# Altium PCB 8Relay.PcbDoc (part 2 of 2)
Units mm, origin at the board's own origin, x right, y up, seen from the top; angles counter-clockwise.
Board outline 164.68 x 100.38 mm, 2 copper layers (Top Layer, Bottom Layer); 122 components, 159 nets, 559 pads, 183 vias.
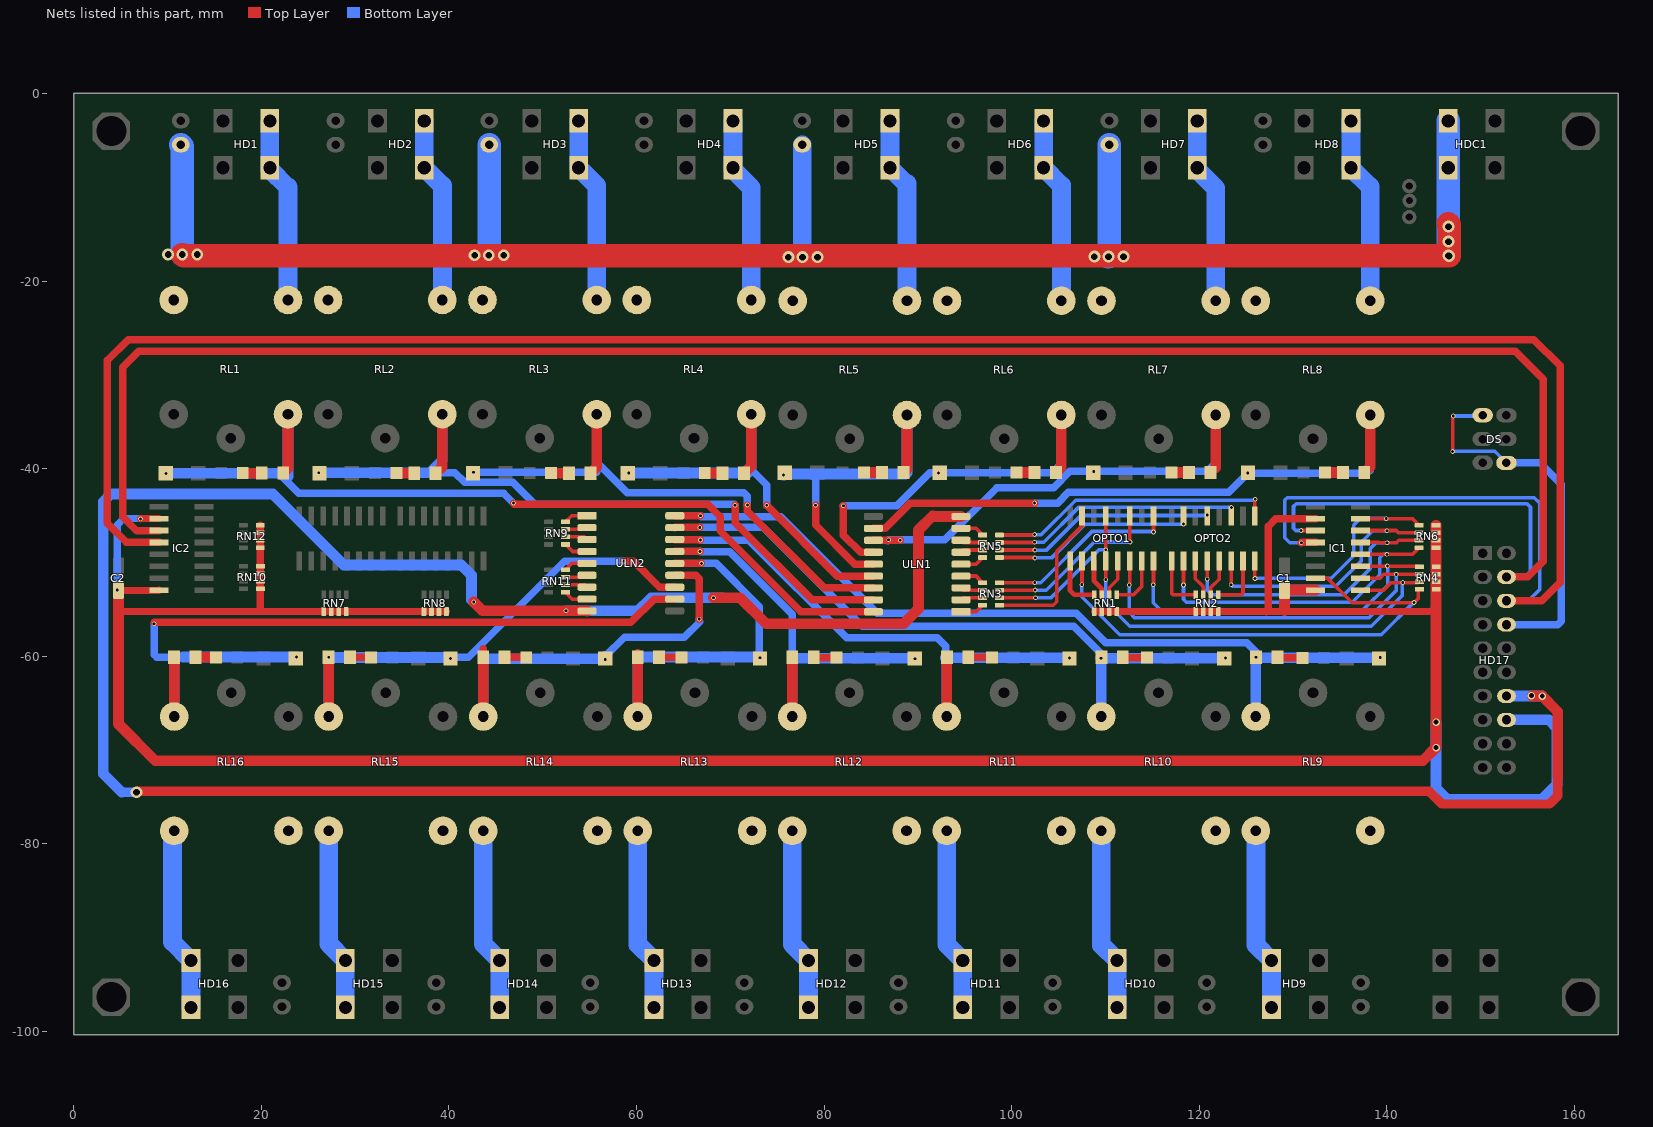
[diagram p2: the nets of this part, all layers, seen from the top]

## Via types
v1: diameter 0.5, hole 0.3, Top Layer to Bottom Layer, 121 vias
v2: diameter 1.27, hole 0.711, Top Layer to Bottom Layer, 54 vias
v3: diameter 0.8, hole 0.5, Top Layer to Bottom Layer, 8 vias

## Nets (pads, with @x,y where several pads share a name; then routed paths per layer and width w, separated by ;. In a path a pad name is that pad's centre, name@x,y a point inside that pad or via, vN(x,y) a via of type N, cw(c..) or ccw(c..) an arc to the next point about the centre after c; other vN are vias at no path point) (continued)
N_LE: HDC1.2 JN1.2 JN3.2 JN5.2 JN7.2 | length 201.1
  Top Layer w2.5: v2(11.55,-17.17) 11.703,-17.323 v2(146.653,-17.323) 146.653,-13.995 v2@146.551,-13.894
  Bottom Layer w2: v2@11.55,-17.043 v2@11.652,-16.942 ; v2@44.24,-17.12 v2@44.342,-17.018 ; JN5.2@77.667,-5.461 77.667,-17.424 v2(77.692,-17.45) ; v2@77.692,-17.323 v2@77.794,-17.221 ; v2@110.331,-17.272 v2@110.433,-17.17
  Bottom Layer w2.5: JN1.2@11.398,-5.461 11.55,-5.613 v2(11.55,-17.17) ; v2(44.24,-17.247) 44.291,-17.196 JN3.2@44.291,-5.461 ; v2(110.331,-17.399) 110.433,-17.297 JN7.2@110.433,-5.461 ; v2@146.565,-17.235 HDC1.2@146.565,-7.916 HDC1.2@146.565,-2.916
  other v2: 76.193,-17.45 79.292,-17.45 108.832,-17.399 111.931,-17.399 146.602,-17.297 42.742,-17.247 45.84,-17.247 10.052,-17.17 13.151,-17.17 146.602,-15.799 146.602,-14.199
NC1: RL1.2
NC2: RL2.2
NC3: RL3.2
NC4: RL4.2
NC5: RL5.2
NC6: RL6.2
NC7: RL7.2
NC8: RL8.2
NC9: RL9.2
NC10: RL10.2
NC11: RL11.2
NC12: RL12.2
NC13: RL13.2
NC14: RL14.2
NC15: RL15.2
NC16: RL16.2
NetLED1_2: LED1.2 R1.2 | length 2
  Top Layer w1.143: LED1.2@18.002,-40.488 20.021,-40.488 R1.2@20.034,-40.475
NetLED2_2: LED2.2 R2.2 | length 1.9
  Top Layer w1.143: LED2.2@34.385,-40.488 36.277,-40.488 R2.2@36.29,-40.5
NetLED3_2: LED3.2 R3.2 | length 1.9
  Top Layer w1.143: LED3.2@50.895,-40.488 52.787,-40.488 R3.2@52.8,-40.5
NetLED4_2: LED4.2 R4.2 | length 1.9
  Top Layer w1.143: LED4.2@67.278,-40.488 69.17,-40.488 R4.2@69.183,-40.5
NetLED5_2: LED5.2 R5.2 | length 1.9
  Top Layer w1.143: LED5.2@84.271,-40.424 86.163,-40.424 R5.2@86.176,-40.437
NetLED6_2: LED6.2 R6.2 | length 1.9
  Top Layer w1.143: LED6.2@100.527,-40.424 102.419,-40.424 R6.2@102.432,-40.437
NetLED7_2: LED7.2 R7.2 | length 1.9
  Top Layer w1.143: LED7.2@117.037,-40.424 118.929,-40.424 R7.2@118.942,-40.437
NetLED8_2: LED8.2 R8.2 | length 1.9
  Top Layer w1.143: LED8.2@133.42,-40.424 135.312,-40.424 R8.2@135.325,-40.437
NetLED9_2: LED9.2 R9.2 | length 2.7
  Top Layer w0.8: R9.2@128.34,-60.122 128.416,-60.198 LED9.2@131.007,-60.198
NetLED10_2: LED10.2 R10.2 | length 2.6
  Top Layer w0.8: R10.2@111.859,-60.122 111.895,-60.158 LED10.2@114.453,-60.158
NetLED11_2: LED11.2 R11.2 | length 2.5
  Top Layer w0.8: R11.2@95.378,-60.122 97.863,-60.122 LED11.2@97.9,-60.158
NetLED12_2: LED12.2 R12.2 | length 2.5
  Top Layer w0.8: R12.2@78.897,-60.122 78.933,-60.158 LED12.2@81.346,-60.158
NetLED13_2: LED13.2 R13.2 | length 2.4
  Top Layer w0.8: R13.2@62.416,-60.122 64.756,-60.122 LED13.2@64.792,-60.158
NetLED14_2: LED14.2 R14.2 | length 2.3
  Top Layer w0.8: R14.2@45.935,-60.122 48.202,-60.122 LED14.2@48.239,-60.158
NetLED15_2: LED15.2 R15.2 | length 2.2
  Top Layer w0.8: R15.2@29.454,-60.122 31.649,-60.122 LED15.2@31.685,-60.158
NetLED16_2: LED16.2 R16.2 | length 2.2
  Top Layer w1.143: R16.2@12.973,-60.122 15.095,-60.122 LED16.2@15.132,-60.158
NO1: HD1.1 RL1.3 | length 19.8
  Bottom Layer w2: HD1.1@20.895,-3.094 20.895,-8.094 22.828,-10.027 ; RL1.3@22.828,-22.022 22.828,-9.982
NO2: HD2.1 RL2.3 | length 20
  Bottom Layer w2: HD2.1@37.363,-2.916 HD2.1@37.363,-7.916 39.296,-9.85 ; RL2.3@39.296,-22.022 39.296,-9.804
NO3: HD3.1 RL3.3 | length 20
  Bottom Layer w2: HD3.1@53.83,-2.916 HD3.1@53.83,-7.916 55.763,-9.85 ; RL3.3@55.763,-22.022 55.763,-9.804
NO4: HD4.1 RL4.3 | length 19.9
  Bottom Layer w2: HD4.1@70.298,-2.916 HD4.1@70.298,-7.916 70.298,-8.125 72.231,-10.058 RL4.3@72.231,-22.022
NO5: HD5.1 RL5.3 | length 20.1
  Bottom Layer w2: HD5.1@87.037,-2.916 HD5.1@87.037,-7.916 88.843,-9.723 ; RL5.3@88.843,-22.098 88.843,-9.601
NO6: HD6.1 RL6.3 | length 20
  Bottom Layer w2: HD6.1@103.42,-2.916 HD6.1@103.42,-7.916 105.31,-9.807 ; RL6.3@105.31,-22.098 105.31,-9.779
NO7: HD7.1 RL7.3 | length 20
  Bottom Layer w2: HD7.1@119.803,-2.916 HD7.1@119.803,-7.916 119.803,-8.125 121.778,-10.101 RL7.3@121.778,-22.098
NO8: HD8.1 RL8.3 | length 20.1
  Bottom Layer w2: HD8.1@136.186,-2.916 HD8.1@136.186,-7.916 138.246,-9.977 ; RL8.3@138.246,-22.098 138.246,-9.931
NO9: HD9.1 RL9.3 | length 19.4
  Bottom Layer w2: 126.054,-90.798 HD9.1@127.72,-92.464 HD9.1@127.72,-97.464 ; 126.054,-90.665 RL9.3@126.054,-78.638
NO10: HD10.1 RL10.3 | length 19.6
  Bottom Layer w2: 109.573,-90.83 RL10.3@109.573,-78.638 ; 109.573,-90.78 HD10.1@111.257,-92.464 HD10.1@111.257,-97.464
NO11: HD11.1 RL11.3 | length 19.5
  Bottom Layer w2: RL11.3@93.092,-78.638 93.092,-90.762 HD11.1@94.795,-92.464 HD11.1@94.795,-97.464
NO12: HD12.1 RL12.3 | length 19.5
  Bottom Layer w2: RL12.3@76.611,-78.638 76.611,-90.743 HD12.1@78.332,-92.464 HD12.1@78.332,-97.464
NO13: HD13.1 RL13.3 | length 19.6
  Bottom Layer w2: 60.13,-90.78 RL13.3@60.13,-78.638 ; 60.13,-90.725 HD13.1@61.869,-92.464 HD13.1@61.869,-97.464
NO14: HD14.1 RL14.3 | length 19.5
  Bottom Layer w2: 43.649,-90.707 HD14.1@45.406,-92.464 HD14.1@45.406,-97.464 ; 43.649,-90.632 RL14.3@43.649,-78.638
NO15: HD15.1 RL15.3 | length 19.6
  Bottom Layer w2: RL15.3@27.168,-78.638 27.168,-90.689 HD15.1@28.943,-92.464 HD15.1@28.943,-97.464
NO16: HD16.1 RL16.3 | length 19.7
  Bottom Layer w2: RL16.3@10.687,-78.638 10.509,-78.816 10.509,-90.493 HD16.1@12.48,-92.464 HD16.1@12.48,-97.464
QA: IC1.15 OPTO1.2 RN4.8 | length 55.7
  Top Layer w0.381: v1(107.486,-52.375) 107.512,-52.349 OPTO1.2@107.512,-49.847 ; IC1.15@132.417,-51.689 133.699,-51.689 136.315,-54.305 142.945,-54.305 143.351,-53.899 143.351,-53.005 RN4.8@143.492,-52.864
  Bottom Layer w0.381: v1(107.486,-52.375) 107.486,-53.67 111.55,-57.734 139.414,-57.734 142.868,-54.28 v1(142.919,-54.28)
QA+: OPTO1.1 RN1.8 | length 5.9
  Top Layer w0.508: OPTO1.1@106.242,-49.847 106.242,-53.024 106.673,-53.456 RN1.8@108.826,-53.456
QA-OUT: OPTO1.15 RN3.1 | length 16.5
  Top Layer w0.381: RN3.1@98.709,-54.565 104.457,-54.565 104.819,-54.204 104.819,-48.819 107.512,-46.126 OPTO1.15@107.512,-45.047
QB: IC1.1 OPTO1.4 RN4.7 | length 46.5
  Top Layer w0.381: v1(110.052,-51.841) OPTO1.4@110.052,-49.847 ; IC1.1@137.217,-52.959 139.675,-52.959 140.465,-52.169 143.387,-52.169 RN4.7@143.492,-52.064
  Bottom Layer w0.381: v1(110.052,-51.841) 110.052,-54.254 112.617,-56.82 138.373,-56.82 141.649,-53.543 141.649,-52.222 v1(141.725,-52.146)
QB+: OPTO1.3 RN1.7 | length 4
  Top Layer w0.508: OPTO1.3@108.782,-49.847 108.782,-51.968 109.626,-52.813 RN1.7@109.626,-53.456
QB-OUT: OPTO1.13 RN3.2 | length 17.1
  Top Layer w0.381: RN3.2@98.709,-53.765 98.715,-53.772 v1(102.559,-53.772) ; v1(110.052,-48.666) OPTO1.13@110.052,-45.047
  Bottom Layer w0.381: v1(102.559,-53.772) 104.21,-53.772 109.315,-48.666 v1(110.052,-48.666)
QC: IC1.2 OPTO1.6 RN4.6 | length 43.6
  Top Layer w0.381: v1(112.541,-52.426) 112.592,-52.375 OPTO1.6@112.592,-49.847 ; IC1.2@137.217,-51.689 139.287,-51.689 139.693,-51.283 v1(141.014,-51.283) 143.473,-51.283 RN4.6@143.492,-51.264
  Bottom Layer w0.381: v1(112.541,-52.426) 112.541,-55.321 113.15,-55.931 138.093,-55.931 141.014,-53.01 v1(141.014,-51.283)
QC+: OPTO1.5 RN1.6 | length 4
  Top Layer w0.381: RN1.6@110.426,-53.456 110.426,-52.711 111.322,-51.816 OPTO1.5@111.322,-49.847
QC-OUT: OPTO1.11 RN3.3 | length 18.9
  Top Layer w0.381: RN3.3@98.709,-52.965 98.715,-52.959 v1(102.508,-52.959) ; OPTO1.11@112.592,-45.047 112.592,-47.777 v1(112.642,-47.828)
  Bottom Layer w0.381: v1(102.508,-52.959) 103.689,-52.959 103.695,-52.965 108.832,-47.828 v1(112.642,-47.828)
QD: IC1.3 OPTO1.8 RN4.5 | length 39.2
  Top Layer w0.381: v1(115.106,-52.4) 115.132,-52.375 OPTO1.8@115.132,-49.847 ; IC1.3@137.217,-50.419 143.448,-50.419 RN4.5@143.492,-50.464
  Bottom Layer w0.381: v1(115.106,-52.4) 115.106,-54.305 115.868,-55.067 137.484,-55.067 140.1,-52.451 140.1,-50.419 v1(140.074,-50.394)
QD+: OPTO1.7 RN1.5 | length 5.7
  Top Layer w0.381: RN1.5@111.226,-53.456 113.009,-53.456 113.862,-52.603 OPTO1.7@113.862,-49.847
QD-OUT: OPTO1.9 RN3.4 | length 20.4
  Top Layer w0.381: RN3.4@98.709,-52.165 v1(102.463,-52.165) ; v1(115.132,-46.761) OPTO1.9@115.132,-45.047
  Bottom Layer w0.381: v1(102.463,-52.165) 103.124,-52.165 108.578,-46.711 115.081,-46.711 v1(115.132,-46.761)
QE: IC1.4 OPTO2.2 RN6.8 | length 35.6
  Top Layer w0.381: v1(118.332,-52.426) OPTO2.2@118.332,-49.847 ; IC1.4@137.217,-49.149 142.762,-49.149 RN6.8@143.467,-48.444
  Bottom Layer w0.381: v1(118.332,-52.426) 118.332,-53.95 118.637,-54.254 136.341,-54.254 139.262,-51.333 139.262,-49.505 139.617,-49.149 v1(140.024,-49.149)
QE+: OPTO2.1 RN2.8 | length 6.1
  Top Layer w0.381: OPTO2.1@117.062,-49.847 117.062,-53.315 117.203,-53.456 RN2.8@119.647,-53.456
QE-OUT: OPTO2.15 RN5.1 | length 22
  Top Layer w0.381: RN5.1@98.709,-49.485 102.463,-49.485 102.482,-49.505 v1(102.482,-49.53) ; v1(118.332,-45.923) OPTO2.15@118.332,-45.047
  Bottom Layer w0.381: v1(102.482,-49.53) 104.26,-49.53 107.867,-45.923 v1(118.332,-45.923)
QF: IC1.5 OPTO2.4 RN6.7 | length 32.5
  Top Layer w0.381: v1(120.872,-51.791) OPTO2.4@120.872,-49.847 ; IC1.5@137.217,-47.879 139.16,-47.879 139.211,-47.93 141.014,-47.93 141.3,-47.644 RN6.7@143.467,-47.644
  Bottom Layer w0.381: v1(120.872,-51.791) 120.872,-52.857 120.796,-52.934 121.304,-53.442 135.452,-53.442 138.271,-50.622 138.271,-48.489 138.855,-47.904 v1(140.049,-47.904)
QF+: OPTO2.3 RN2.7 | length 4
  Top Layer w0.381: OPTO2.3@119.602,-49.847 119.602,-51.74 120.447,-52.584 RN2.7@120.447,-53.456
QF-OUT: OPTO2.13 RN5.2 | length 23.7
  Top Layer w0.381: RN5.2@98.709,-48.685 v1@102.482,-48.685
  Bottom Layer w0.381: v1(102.482,-48.692) 103.727,-48.692 107.41,-45.009 120.821,-45.009 v1(120.872,-44.958)
QG: IC1.6 OPTO2.6 RN6.6 | length 29.2
  Top Layer w0.381: v1(123.412,-52.4) OPTO2.6@123.412,-49.847 ; IC1.6@137.217,-46.609 141.014,-46.609 141.249,-46.844 RN6.6@143.467,-46.844
  Bottom Layer w0.381: v1(123.412,-52.4) 123.564,-52.553 134.588,-52.553 137.28,-49.86 137.28,-47.854 138.5,-46.634 v1(140.024,-46.634)
QG+: OPTO2.5 RN2.6 | length 4
  Top Layer w0.381: RN2.6@121.247,-53.456 121.247,-52.686 122.142,-51.791 OPTO2.5@122.142,-49.847
QG-OUT: OPTO2.11 RN5.3 | length 26.3
  Top Layer w0.381: RN5.3@98.709,-47.885 102.425,-47.885 v1(102.457,-47.854)
  Bottom Layer w0.381: v1(102.457,-47.854) 103.422,-47.854 107.131,-44.145 v1(123.437,-44.145)
QH: IC1.7 OPTO2.8 RN6.5 | length 27
  Top Layer w0.381: v1(125.952,-51.714) OPTO2.8@125.952,-49.847 ; IC1.7@137.217,-45.339 142.762,-45.339 RN6.5@143.467,-46.044
  Bottom Layer w0.381: v1(125.952,-51.714) 134.08,-51.714 136.493,-49.301 136.493,-46.025 137.204,-45.314 139.922,-45.314 v1(139.947,-45.339)
QH+: OPTO2.7 RN2.5 | length 6.1
  Top Layer w0.381: RN2.5@122.047,-53.456 124.464,-53.456 124.682,-53.238 OPTO2.7@124.682,-49.847
QH-OUT: OPTO2.9 RN5.4 | length 30.6
  Top Layer w0.381: RN5.4@98.709,-47.085 102.412,-47.085 v1(102.457,-47.041) ; OPTO2.9@125.952,-45.047 v1@125.952,-43.282
  Bottom Layer w0.381: v1(102.457,-47.041) 103.168,-47.041 106.843,-43.366 125.893,-43.366 v1(125.977,-43.282)
RL_GND: HD17.17 ULN1.9 ULN2.9 | length 315.4
  Top Layer w1: v2(6.674,-74.524) 6.769,-74.428 144.551,-74.428 145.891,-75.768 157.372,-75.768 158.261,-74.879 158.261,-72.796
  Top Layer w1.143: v1(42.64,-54.229) 43.58,-55.169 v1(52.47,-55.169) 54.71,-55.169 ULN2.9@54.729,-55.188 ; v1(68.218,-53.772) 71.037,-53.772 73.822,-56.557 88.462,-56.557 90.062,-54.956 90.062,-46.558 91.586,-45.034 91.662,-45.11 ULN1.9@94.61,-45.11 ; v3@155.518,-64.262 v3(156.584,-64.262) 158.261,-65.938 158.261,-72.796
  Bottom Layer w1: 5.099,-74.524 v2(6.674,-74.524)
  Bottom Layer w1.143: 5.099,-74.524 3.118,-72.542 3.118,-43.536 3.93,-42.723 21.202,-42.723 28.772,-50.292 41.319,-50.292 42.411,-51.384 42.411,-54 v1(42.64,-54.229) ; v1(52.47,-55.169) 60.166,-55.169 61.563,-53.772 69.234,-53.772 ; HD17.17@152.774,-64.262 v3(156.584,-64.262)
  other v1: 155.441,-64.211
  other v3: 155.441,-64.211
RL_IN1: RN3.8 ULN1.1 | length 2.6
  Top Layer w0.381: ULN1.1@94.61,-55.27 96.204,-55.27 RN3.8@96.909,-54.565
RL_IN2: RN3.7 ULN1.2 | length 2.4
  Top Layer w0.381: ULN1.2@94.61,-54 94.845,-53.765 RN3.7@96.909,-53.765
RL_IN3: RN3.6 ULN1.3 | length 2.4
  Top Layer w0.381: ULN1.3@94.61,-52.73 94.845,-52.965 RN3.6@96.909,-52.965
RL_IN4: RN3.5 ULN1.4 | length 2.6
  Top Layer w0.381: ULN1.4@94.61,-51.46 96.204,-51.46 RN3.5@96.909,-52.165
RL_IN5: RN5.8 ULN1.5 | length 2.6
  Top Layer w0.381: ULN1.5@94.61,-50.19 96.204,-50.19 RN5.8@96.909,-49.485
RL_IN6: RN5.7 ULN1.6 | length 2.4
  Top Layer w0.381: ULN1.6@94.61,-48.92 94.845,-48.685 RN5.7@96.909,-48.685
RL_IN7: RN5.6 ULN1.7 | length 2.4
  Top Layer w0.381: ULN1.7@94.61,-47.65 94.845,-47.885 RN5.6@96.909,-47.885
RL_IN8: RN5.5 ULN1.8 | length 2.6
  Top Layer w0.381: ULN1.8@94.61,-46.38 96.204,-46.38 RN5.5@96.909,-47.085
RL_IN9: RN9.8 ULN2.1 | length 2.6
  Top Layer w0.381: RN9.8@52.43,-45.688 53.084,-45.034 ULN2.1@54.729,-45.034
RL_IN10: RN9.7 ULN2.2 | length 2.4
  Top Layer w0.381: RN9.7@52.43,-46.488 54.545,-46.488 ULN2.2@54.729,-46.304
RL_IN11: RN9.6 ULN2.3 | length 2.4
  Top Layer w0.381: RN9.6@52.43,-47.288 54.443,-47.288 ULN2.3@54.729,-47.574
RL_IN12: RN9.5 ULN2.4 | length 2.6
  Top Layer w0.381: RN9.5@52.43,-48.088 53.186,-48.844 ULN2.4@54.729,-48.844
RL_IN13: RN11.8 ULN2.5 | length 2.6
  Top Layer w0.381: RN11.8@52.43,-50.794 53.11,-50.114 ULN2.5@54.729,-50.114
RL_IN14: RN11.7 ULN2.6 | length 2.4
  Top Layer w0.381: RN11.7@52.43,-51.594 54.519,-51.594 ULN2.6@54.729,-51.384
RL_IN15: RN11.6 ULN2.7 | length 2.4
  Top Layer w0.381: RN11.6@52.43,-52.394 54.469,-52.394 ULN2.7@54.729,-52.654
RL_IN16: RN11.5 ULN2.8 | length 2.6
  Top Layer w0.381: RN11.5@52.43,-53.194 53.16,-53.924 ULN2.8@54.729,-53.924
RL_OUT1: D1.1 R1.1 RL1.4 ULN1.18 | length 95.5
  Top Layer w0.8: v1(46.882,-43.688) 46.983,-43.79 67.583,-43.79 68.904,-45.11 68.904,-46.634 77.54,-55.27 ULN1.18@85.26,-55.27
  Top Layer w1.143: R1.1@22.32,-40.475 22.828,-39.967 RL1.4@22.828,-34.214
  Bottom Layer w0.8: 21.863,-40.513 23.971,-42.621 45.815,-42.621 v1(46.882,-43.688)
  Bottom Layer w1.143: v1(9.823,-40.513) 21.863,-40.513 ; 22.828,-40.843 RL1.4@22.828,-34.214
RL_OUT2: D2.1 R2.1 RL2.4 ULN1.17 | length 79.3
  Top Layer w0.8: R2.1@38.576,-40.5 R2.1@38.652,-40.577 ; v1(70.504,-43.917) 70.504,-45.771 78.733,-54 ULN1.17@85.26,-54
  Top Layer w1.143: R2.1@38.576,-40.5 39.296,-39.781 RL2.4@39.296,-34.214
  Bottom Layer w0.8: 37.983,-40.437 40.636,-40.437 41.677,-41.478 46.806,-41.478 49.142,-43.815 70.402,-43.815 v1(70.504,-43.917)
  Bottom Layer w1.143: v1(26.105,-40.437) 37.983,-40.437 39.296,-39.124 RL2.4@39.296,-34.214
RL_OUT3: D3.1 R3.1 RL3.4 ULN1.16 | length 61.9
  Top Layer w0.8: v1(71.825,-43.891) 71.825,-44.526 80.029,-52.73 ULN1.16@85.26,-52.73
  Top Layer w1.143: R3.1@55.086,-40.5 55.763,-39.823 RL3.4@55.763,-34.214
  Bottom Layer w0.8: v1(42.615,-40.386) 55.763,-40.386 55.763,-39.336 ; RL3.4@55.763,-34.214 55.763,-39.336 ; v1(71.825,-43.891) 71.825,-42.951 71.444,-42.57 58.998,-42.57 55.763,-39.336
RL_OUT4: D4.1 R4.1 RL4.4 ULN1.15 | length 44.9
  Top Layer w0.8: D4.1@59.076,-40.5 59.137,-40.5 v1(59.175,-40.462) ; R4.1@71.469,-40.5 R4.1@71.545,-40.577 ; v1(73.882,-43.917) 81.426,-51.46 ULN1.15@85.26,-51.46
  Top Layer w1.143: R4.1@71.469,-40.5 72.231,-39.738 RL4.4@72.231,-34.214
  Bottom Layer w0.8: 72.231,-40.102 73.882,-41.753 v1(73.882,-43.917)
  Bottom Layer w1.143: v1(59.175,-40.462) 71.871,-40.462 72.231,-40.102 RL4.4@72.231,-34.214
RL_OUT5: D5.1 R5.1 RL5.4 ULN1.14 | length 39.1
  Top Layer w0.8: v1(79.089,-43.917) 79.089,-45.999 83.28,-50.19 ULN1.14@85.26,-50.19
  Top Layer w1.143: R5.1@88.462,-40.437 88.843,-40.056 RL5.4@88.843,-34.29
  Bottom Layer w0.8: v1(79.089,-43.917) 79.089,-40.589
  Bottom Layer w1.143: v1(75.66,-40.691) 75.762,-40.691 75.863,-40.589 79.089,-40.589 88.69,-40.589 88.843,-40.437 RL5.4@88.843,-34.29
RL_OUT6: D6.1 R6.1 RL6.4 ULN1.13 | length 43.8
  Top Layer w0.8: v1(82.061,-43.967) 82.061,-47.092 83.89,-48.92 ULN1.13@85.26,-48.92
  Top Layer w1.143: R6.1@104.718,-40.437 105.31,-39.844 RL6.4@105.31,-34.29
  Bottom Layer w0.8: v1(82.061,-43.967) 87.75,-43.967 91.256,-40.462 v1(92.221,-40.462) 92.246,-40.437 104.337,-40.437 105.31,-39.463 RL6.4@105.31,-34.29
RL_OUT7: D7.1 R7.1 RL7.4 ULN1.12 | length 52.5
  Top Layer w0.8: ULN1.12@85.26,-47.65 v1(88.131,-47.65) ; R7.1@121.431,-40.234 R7.1@121.778,-39.886
  Top Layer w1.143: R7.1@121.778,-39.886 RL7.4@121.778,-34.29
  Bottom Layer w0.8: v1@86.811,-47.676 v1(86.887,-47.6) 92.881,-47.6 98.444,-42.037 104.489,-42.037 106.216,-40.31 120.847,-40.31 121.778,-39.378 RL7.4@121.778,-34.29
  other v1: 108.756,-40.31
RL_OUT8: D8.1 R8.1 RL8.4 ULN1.11 | length 68.2
  Top Layer w0.8: ULN1.11@85.26,-46.38 86.506,-46.38 89.211,-43.675 v1(102.457,-43.675)
  Top Layer w1.143: R8.1@137.611,-40.437 138.246,-39.802 RL8.4@138.246,-34.29
  Bottom Layer w0.8: v1(102.457,-43.675) 104.908,-43.675 106.062,-42.522 123.156,-42.522 v1(125.19,-40.488) ; 124.955,-40.773 125.222,-40.507 137.896,-40.507 138.246,-40.157 RL8.4@138.246,-34.29
RL_OUT9: D9.1 R9.1 RL9.4 ULN2.18 | length 88.2
  Top Layer w0.8: ULN2.18@64.079,-45.034 v1(66.821,-45.034)
  Bottom Layer w0.8: v1(66.821,-45.034) 66.922,-45.136 75.406,-45.136 85.693,-55.423 106.877,-55.423 110.033,-58.579 125.088,-58.579 126.054,-59.544 v1@126.054,-60.249
  Bottom Layer w1.143: RL9.4@126.054,-66.446 126.054,-60.249 126.13,-60.173 139.287,-60.173 v1(139.312,-60.147)
  other v1: 126.054,-60.122
RL_OUT10: D10.1 R10.1 RL10.4 ULN2.17 | length 71.1
  Top Layer w0.8: ULN2.17@64.079,-46.304 64.104,-46.279 v1(66.745,-46.279)
  Bottom Layer w0.8: v1(66.745,-46.279) 73.526,-46.279 84.067,-56.82 106.623,-56.82 109.544,-59.741 v1(109.544,-60.223)
  Bottom Layer w1.143: RL10.4@109.573,-66.446 109.573,-60.252 v1(109.544,-60.223) 122.802,-60.223 v1(122.828,-60.198)
RL_OUT11: D11.1 R11.1 RL11.4 ULN2.16 | length 60.7
  Top Layer w0.8: ULN2.16@64.079,-47.574 66.77,-47.574 v1(66.821,-47.625)
  Top Layer w1.143: RL11.4@93.092,-66.446 R11.1@93.092,-60.122
  Bottom Layer w0.8: v1(66.821,-47.625) 71.977,-47.625 82.416,-58.064 92.094,-58.064 92.957,-58.928 92.957,-60.173
  Bottom Layer w1.143: RL11.4@93.092,-66.446 93.092,-60.307 92.957,-60.173 106.165,-60.173 v1(106.191,-60.198)
RL_OUT12: D12.1 R12.1 RL12.4 ULN2.15 | length 45.8
  Top Layer w0.8: ULN2.15@64.079,-48.844 v1(66.77,-48.844)
  Top Layer w1.143: RL12.4@76.611,-66.446 R12.1@76.611,-60.122
  Bottom Layer w0.8: v1(66.77,-48.844) 66.795,-48.87 69.92,-48.87 76.611,-55.561 76.611,-60.136
  Bottom Layer w1.143: RL12.4@76.611,-66.446 76.611,-60.136 76.701,-60.046 76.879,-60.223 89.655,-60.223 v1(89.706,-60.274)
RL_OUT13: D13.1 R13.1 RL13.4 ULN2.14 | length 42.4
  Top Layer w0.8: R13.1@60.13,-60.122 R13.1@60.13,-59.625 ; ULN2.14@64.079,-50.114 v1(66.922,-50.114)
  Top Layer w1.143: RL13.4@60.13,-66.446 R13.1@60.13,-60.122
  Bottom Layer w0.8: v1(66.922,-50.114) 68.497,-50.114 73.095,-54.712 v1@73.095,-60.096
  Bottom Layer w1.143: RL13.4@60.13,-66.446 60.13,-60.107 60.141,-60.096 v1@73.095,-60.096
  other v1: 73.171,-60.173
RL_OUT14: D14.1 R14.1 RL14.4 ULN2.13 | length 45.2
  Top Layer w0.8: R14.1@43.649,-60.122 43.649,-59.215 ; ULN2.13@64.079,-51.384 66.313,-51.384 66.694,-51.765 v1(66.694,-56.058)
  Top Layer w1.143: RL14.4@43.649,-66.446 R14.1@43.649,-60.122
  Bottom Layer w0.8: 56.67,-60.037 58.718,-57.988 65.094,-57.988 66.719,-56.363 66.694,-56.337 v1(66.694,-56.058)
  Bottom Layer w1.143: RL14.4@43.649,-66.446 43.649,-60.662 44.037,-60.274 56.432,-60.274 56.67,-60.037
  other v1: 56.661,-60.376
RL_OUT15: D15.1 R15.1 RL15.4 ULN2.12 | length 54.9
  Top Layer w0.8: v1(58.667,-49.886) 59.683,-49.886 62.452,-52.654 ULN2.12@64.079,-52.654
  Top Layer w1.143: RL15.4@27.168,-66.446 v1(27.168,-60.122)
  Bottom Layer w0.8: v1@40.065,-60.147 42.056,-60.147 52.343,-49.86 v1@58.667,-49.86
  Bottom Layer w1.143: RL15.4@27.168,-66.446 27.168,-60.227 27.248,-60.147 v1@40.065,-60.147
  other v1: 40.167,-60.249
RL_OUT16: D16.1 R16.1 RL16.4 ULN2.11 | length 87.8
  Top Layer w0.8: v1@8.553,-56.413 59.404,-56.413 61.893,-53.924 ULN2.11@64.079,-53.924
  Top Layer w1.143: RL16.4@10.687,-66.446 R16.1@10.687,-60.122
  Bottom Layer w0.8: v1(8.553,-56.54) 8.553,-59.842 8.807,-60.096 10.687,-60.096 11.627,-60.096
  Bottom Layer w1.143: RL16.4@10.687,-66.446 10.687,-60.096 ; 11.627,-60.096 v1(23.742,-60.096)
SHCP: HD17.12 IC1.11 IC2.11 | length 237.9
  Top Layer w0.381: v1(130.88,-46.609) IC1.11@132.417,-46.609
  Top Layer w0.8: IC2.11@9.074,-46.609 6.674,-46.609 5.2,-45.136 5.2,-29.21 6.928,-27.483 153.714,-27.483 156.724,-30.493 156.724,-49.873 155.035,-51.562 HD17.12@152.774,-51.562
  Bottom Layer w0.381: v1(130.88,-46.609) 130.295,-46.609 130.067,-46.38 130.067,-44.044 130.372,-43.739 154.959,-43.739 155.34,-44.12 155.34,-50.978 154.756,-51.562 HD17.12@152.774,-51.562
STCP: HD17.13 IC1.12 IC2.12 | length 258.7
  Top Layer w0.8: IC2.12@9.074,-47.879 5.607,-47.879 3.549,-45.822 3.549,-28.473 5.772,-26.251 8.376,-26.251 8.382,-26.257 9.029,-26.257 9.035,-26.251 155.708,-26.251 158.515,-29.058 158.515,-52.146 156.559,-54.102 HD17.13@152.774,-54.102 ; v1(130.905,-47.904) 130.93,-47.879 IC1.12@132.417,-47.879
  Bottom Layer w0.381: v1(130.905,-47.904) 129.66,-47.904 129.127,-47.371 129.127,-43.358 129.381,-43.104 155.746,-43.104 156.305,-43.663 156.305,-52.908 155.111,-54.102 HD17.13@152.774,-54.102
SUB_DS_IN: DS.1 DS.6 HD17.14 | length 40.7
  Top Layer w0.381: v1(147.034,-38.176) 147.034,-34.468 v1(147.11,-34.392)
  Bottom Layer w0.381: v1(147.034,-38.176) 147.542,-38.176 147.567,-38.151 151.53,-38.151 DS.6@152.774,-39.395 ; v1(147.11,-34.392) 150.158,-34.392 DS.1@150.234,-34.315
  Bottom Layer w0.8: HD17.14@152.774,-56.642 158.261,-56.642 158.642,-56.261 158.642,-41.681 156.356,-39.395 DS.6@152.774,-39.395
VCC: C1.1 C2.1 HD17.18 IC1.10 IC1.16 IC2.10 IC2.16 RN1.1 RN1.2 RN1.3 RN1.4 RN2.1 RN2.2 RN2.3 RN2.4 RN4.1 RN4.2 RN4.3 RN4.4 RN6.1 RN6.2 RN6.3 RN6.4 RN7.1 RN7.2 RN7.3 RN7.4 RN8.1 RN8.2 RN8.3 RN8.4 RN10.1 RN10.2 RN10.3 RN10.4 RN12.1 RN12.2 RN12.3 RN12.4 | length 330.7
  Top Layer w0.762: 4.743,-55.55 5.037,-55.256 19.969,-55.256 ; C2.1@4.743,-52.989 9.044,-52.989 IC2.16@9.074,-52.959 ; v1(7.105,-45.364) 7.131,-45.339 IC2.10@9.074,-45.339 ; RN12.4@19.867,-46.044 RN12.3@19.867,-46.844 19.867,-55.154 19.969,-55.256 ; RN8.4@39.725,-55.256 RN8.3@38.925,-55.256 RN8.2@38.125,-55.256 RN8.1@37.325,-55.256 RN7.4@29.032,-55.256 RN7.3@28.232,-55.256 RN7.2@27.432,-55.256 RN7.1@26.632,-55.256 19.969,-55.256 ; RN1.1@108.826,-55.256 RN1.2@109.626,-55.256 RN1.3@110.426,-55.256 RN1.4@111.226,-55.256 127.171,-55.256 144.737,-55.256 145.267,-54.726
  Top Layer w0.8: 127.171,-55.256 127.349,-55.078 127.349,-46.177 128.187,-45.339 IC1.10@132.417,-45.339
  Top Layer w1.143: C2.1@4.743,-52.989 4.743,-55.55 4.743,-67.234 8.68,-71.171 143.845,-71.171 v3(145.267,-69.748) v1(145.267,-67.031) 145.267,-54.726 RN6.1@145.267,-48.444 RN6.2@145.267,-47.644 RN6.3@145.267,-46.844 RN6.4@145.267,-46.044 ; 129.102,-55.129 C1.1@129.102,-52.989 129.132,-52.959 IC1.16@132.417,-52.959
  Bottom Layer w0.762: v1(4.616,-52.959) 4.616,-46.025 5.302,-45.339 v1@7.105,-45.339
  Bottom Layer w1.143: v1(145.267,-67.031) 145.267,-74.128 146.424,-75.286 156.559,-75.286 158.159,-73.685 158.159,-67.666 157.296,-66.802 HD17.18@152.774,-66.802
  other v3: 145.267,-67.031
pads on no net: C1.0 C2.0 HD17.1 HD17.2 HD17.3 HD17.4 HD17.5 HD17.6 HD17.7 HD17.8 HD17.9 HD17.10 HD17.15 HD17.19 RN1.0 RN2.0 RN3.0 RN4.0 RN5.0 RN6.0 RN7.0 RN8.0 RN9.0 RN10.0 RN11.0 RN12.0

## Keep-outs
Keep-Out Layer:
  lines w0.254: 24.606,-19.025 24.606,-24.511 25.317,-24.511 25.317,-19.025 ; 24.657,-19.075 25.368,-19.075 ; 41.074,-19.025 41.074,-24.511 41.785,-24.511 41.785,-19.025 ; 41.125,-19.075 41.836,-19.075 ; 57.541,-19.025 57.541,-24.511 58.253,-24.511 58.253,-19.025 ; 57.592,-19.075 58.303,-19.075 ; 74.009,-19.025 74.009,-24.511 74.72,-24.511 74.72,-19.025 ; 74.06,-19.075 74.771,-19.075 ; 90.621,-19.101 90.621,-24.587 91.332,-24.587 91.332,-19.101 ; 90.671,-19.152 91.383,-19.152 ; 107.088,-19.101 107.088,-24.587 107.8,-24.587 107.8,-19.101 ; 107.139,-19.152 107.85,-19.152 ; 123.556,-19.101 123.556,-24.587 124.267,-24.587 124.267,-19.101 ; 123.607,-19.152 124.318,-19.152 ; 140.024,-19.101 140.024,-24.587 140.735,-24.587 140.735,-19.101 ; 140.074,-19.152 140.786,-19.152 ; 0,-100.381 164.68,-100.381 164.68,0 0,0 0,-100.381 ; 8.198,-81.636 8.909,-81.636 8.909,-76.149 8.198,-76.149 8.198,-81.636 ; 10.052,-25.298 10.052,-24.79 13.049,-24.79 13.735,-24.105 13.735,-20.574 12.998,-19.837 12.998,-19.075 14.243,-20.32 14.243,-24.46 13.405,-25.298 10.052,-25.298 ; 10.103,-75.87 13.1,-75.87 13.786,-76.556 13.786,-80.086 13.049,-80.823 13.049,-81.585 14.294,-80.34 14.294,-76.2 13.455,-75.362 10.103,-75.362 10.103,-75.87 ; 13.201,-37.922 13.201,-30.836 13.989,-30.836 13.989,-37.516 15.03,-38.557 18.18,-38.557 19.221,-37.516 19.221,-30.836 19.983,-30.836 19.983,-37.897 18.586,-39.294 14.573,-39.294 13.201,-37.922 ; 13.532,-69.825 14.294,-69.825 14.294,-63.144 15.335,-62.103 18.485,-62.103 19.526,-63.144 19.526,-69.825 20.313,-69.825 20.313,-62.738 18.942,-61.366 14.929,-61.366 13.532,-62.763 13.532,-69.825 ; 19.221,-24.46 19.221,-20.32 20.466,-19.075 20.466,-19.837 19.729,-20.574 19.729,-24.105 20.415,-24.79 23.412,-24.79 23.412,-25.298 20.059,-25.298 19.221,-24.46 ; 19.272,-80.34 20.517,-81.585 20.517,-80.823 19.78,-80.086 19.78,-76.556 20.466,-75.87 23.463,-75.87 23.463,-75.362 20.11,-75.362 19.272,-76.2 19.272,-80.34 ; 24.679,-81.636 25.39,-81.636 25.39,-76.149 24.679,-76.149 24.679,-81.636 ; 26.52,-25.298 29.872,-25.298 30.711,-24.46 30.711,-20.32 29.466,-19.075 29.466,-19.837 30.203,-20.574 30.203,-24.105 29.517,-24.79 26.52,-24.79 26.52,-25.298 ; 26.584,-75.87 29.581,-75.87 30.267,-76.556 30.267,-80.086 29.53,-80.823 29.53,-81.585 30.775,-80.34 30.775,-76.2 29.936,-75.362 26.584,-75.362 26.584,-75.87 ; 29.669,-37.922 31.041,-39.294 35.054,-39.294 36.451,-37.897 36.451,-30.836 35.689,-30.836 35.689,-37.516 34.648,-38.557 31.498,-38.557 30.457,-37.516 30.457,-30.836 29.669,-30.836 29.669,-37.922 ; 30.013,-69.825 30.775,-69.825 30.775,-63.144 31.816,-62.103 34.966,-62.103 36.007,-63.144 36.007,-69.825 36.794,-69.825 36.794,-62.738 35.423,-61.366 31.41,-61.366 30.013,-62.763 30.013,-69.825 ; 35.689,-24.46 36.527,-25.298 39.88,-25.298 39.88,-24.79 36.883,-24.79 36.197,-24.105 36.197,-20.574 36.934,-19.837 36.934,-19.075 35.689,-20.32 35.689,-24.46 ; 35.753,-80.34 36.998,-81.585 36.998,-80.823 36.261,-80.086 36.261,-76.556 36.947,-75.87 39.944,-75.87 39.944,-75.362 36.591,-75.362 35.753,-76.2 35.753,-80.34 ; 41.16,-81.636 41.871,-81.636 41.871,-76.149 41.16,-76.149 41.16,-81.636 ; 42.987,-25.298 46.34,-25.298 47.178,-24.46 47.178,-20.32 45.934,-19.075 45.934,-19.837 46.67,-20.574 46.67,-24.105 45.984,-24.79 42.987,-24.79 42.987,-25.298 ; 43.065,-75.87 46.062,-75.87 46.748,-76.556 46.748,-80.086 46.011,-80.823 46.011,-81.585 47.256,-80.34 47.256,-76.2 46.417,-75.362 43.065,-75.362 43.065,-75.87 ; 46.137,-37.922 47.508,-39.294 51.522,-39.294 52.919,-37.897 52.919,-30.836 52.157,-30.836 52.157,-37.516 51.115,-38.557 47.966,-38.557 46.924,-37.516 46.924,-30.836 46.137,-30.836 46.137,-37.922 ; 46.494,-69.825 47.256,-69.825 47.256,-63.144 48.297,-62.103 51.447,-62.103 52.488,-63.144 52.488,-69.825 53.275,-69.825 53.275,-62.738 51.904,-61.366 47.891,-61.366 46.494,-62.763 46.494,-69.825 ; 52.157,-24.46 52.995,-25.298 56.348,-25.298 56.348,-24.79 53.35,-24.79 52.665,-24.105 52.665,-20.574 53.401,-19.837 53.401,-19.075 52.157,-20.32 52.157,-24.46 ; 52.234,-80.34 53.479,-81.585 53.479,-80.823 52.742,-80.086 52.742,-76.556 53.428,-75.87 56.425,-75.87 56.425,-75.362 53.072,-75.362 52.234,-76.2 52.234,-80.34 ; 57.641,-81.636 58.352,-81.636 58.352,-76.149 57.641,-76.149 57.641,-81.636 ; 59.455,-25.298 62.808,-25.298 63.646,-24.46 63.646,-20.32 62.401,-19.075 62.401,-19.837 63.138,-20.574 63.138,-24.105 62.452,-24.79 59.455,-24.79 59.455,-25.298 ; 59.546,-75.87 62.543,-75.87 63.229,-76.556 63.229,-80.086 62.492,-80.823 62.492,-81.585 63.737,-80.34 63.737,-76.2 62.898,-75.362 59.546,-75.362 59.546,-75.87 ; 62.604,-37.922 63.976,-39.294 67.989,-39.294 69.386,-37.897 69.386,-30.836 68.624,-30.836 68.624,-37.516 67.583,-38.557 64.433,-38.557 63.392,-37.516 63.392,-30.836 62.604,-30.836 62.604,-37.922 ; 62.975,-69.825 63.737,-69.825 63.737,-63.144 64.778,-62.103 67.928,-62.103 68.969,-63.144 68.969,-69.825 69.756,-69.825 69.756,-62.738 68.385,-61.366 64.372,-61.366 62.975,-62.763 62.975,-69.825 ; 68.624,-24.46 69.462,-25.298 72.815,-25.298 72.815,-24.79 69.818,-24.79 69.132,-24.105 69.132,-20.574 69.869,-19.837 69.869,-19.075 68.624,-20.32 68.624,-24.46 ; 68.715,-80.34 69.96,-81.585 69.96,-80.823 69.223,-80.086 69.223,-76.556 69.909,-75.87 72.906,-75.87 72.906,-75.362 69.553,-75.362 68.715,-76.2 68.715,-80.34 ; 74.121,-81.636 74.833,-81.636 74.833,-76.149 74.121,-76.149 74.121,-81.636 ; 76.026,-75.87 79.024,-75.87 79.709,-76.556 79.709,-80.086 78.973,-80.823 78.973,-81.585 80.218,-80.34 80.218,-76.2 79.379,-75.362 76.026,-75.362 76.026,-75.87 ; 76.066,-25.375 79.419,-25.375 80.257,-24.536 80.257,-20.396 79.013,-19.152 79.013,-19.914 79.749,-20.65 79.749,-24.181 79.064,-24.867 76.066,-24.867 76.066,-25.375 ; 79.216,-37.998 80.588,-39.37 84.601,-39.37 85.998,-37.973 85.998,-30.912 85.236,-30.912 85.236,-37.592 84.194,-38.633 81.045,-38.633 80.003,-37.592 80.003,-30.912 79.216,-30.912 79.216,-37.998 ; 79.455,-69.825 80.217,-69.825 80.217,-63.144 81.259,-62.103 84.408,-62.103 85.45,-63.144 85.45,-69.825 86.237,-69.825 86.237,-62.738 84.866,-61.366 80.852,-61.366 79.455,-62.763 79.455,-69.825 ; 85.196,-80.34 86.44,-81.585 86.44,-80.823 85.704,-80.086 85.704,-76.556 86.39,-75.87 89.387,-75.87 89.387,-75.362 86.034,-75.362 85.196,-76.2 85.196,-80.34 ; 85.236,-24.536 86.074,-25.375 89.427,-25.375 89.427,-24.867 86.43,-24.867 85.744,-24.181 85.744,-20.65 86.48,-19.914 86.48,-19.152 85.236,-20.396 85.236,-24.536 ; 90.602,-81.636 91.314,-81.636 91.314,-76.149 90.602,-76.149 90.602,-81.636 ; 92.507,-75.87 95.505,-75.87 96.19,-76.556 96.19,-80.086 95.454,-80.823 95.454,-81.585 96.698,-80.34 96.698,-76.2 95.86,-75.362 92.507,-75.362 92.507,-75.87 ; 92.534,-25.375 95.887,-25.375 96.725,-24.536 96.725,-20.396 95.481,-19.152 95.481,-19.914 96.217,-20.65 96.217,-24.181 95.531,-24.867 92.534,-24.867 92.534,-25.375 ; 95.684,-37.998 97.055,-39.37 101.069,-39.37 102.466,-37.973 102.466,-30.912 101.704,-30.912 101.704,-37.592 100.662,-38.633 97.513,-38.633 96.471,-37.592 96.471,-30.912 95.684,-30.912 95.684,-37.998 ; 95.936,-69.825 96.698,-69.825 96.698,-63.144 97.74,-62.103 100.889,-62.103 101.931,-63.144 101.931,-69.825 102.718,-69.825 102.718,-62.738 101.347,-61.366 97.333,-61.366 95.936,-62.763 95.936,-69.825 ; 101.677,-80.34 102.921,-81.585 102.921,-80.823 102.185,-80.086 102.185,-76.556 102.871,-75.87 105.868,-75.87 105.868,-75.362 102.515,-75.362 101.677,-76.2 101.677,-80.34 ; 101.704,-24.536 102.542,-25.375 105.895,-25.375 105.895,-24.867 102.897,-24.867 102.212,-24.181 102.212,-20.65 102.948,-19.914 102.948,-19.152 101.704,-20.396 101.704,-24.536 ; 107.083,-81.636 107.795,-81.636 107.795,-76.149 107.083,-76.149 107.083,-81.636 ; 108.988,-75.87 111.986,-75.87 112.671,-76.556 112.671,-80.086 111.935,-80.823 111.935,-81.585 113.179,-80.34 113.179,-76.2 112.341,-75.362 108.988,-75.362 108.988,-75.87 ; 109.002,-25.375 112.355,-25.375 113.193,-24.536 113.193,-20.396 111.948,-19.152 111.948,-19.914 112.685,-20.65 112.685,-24.181 111.999,-24.867 109.002,-24.867 109.002,-25.375 ; 112.151,-37.998 113.523,-39.37 117.536,-39.37 118.933,-37.973 118.933,-30.912 118.171,-30.912 118.171,-37.592 117.13,-38.633 113.98,-38.633 112.939,-37.592 112.939,-30.912 112.151,-30.912 112.151,-37.998 ; 112.417,-69.825 113.179,-69.825 113.179,-63.144 114.221,-62.103 117.37,-62.103 118.412,-63.144 118.412,-69.825 119.199,-69.825 119.199,-62.738 117.828,-61.366 113.814,-61.366 112.417,-62.763 112.417,-69.825 ; 118.158,-80.34 119.402,-81.585 119.402,-80.823 118.666,-80.086 118.666,-76.556 119.352,-75.87 122.349,-75.87 122.349,-75.362 118.996,-75.362 118.158,-76.2 118.158,-80.34 ; 118.171,-24.536 119.009,-25.375 122.362,-25.375 122.362,-24.867 119.365,-24.867 118.679,-24.181 118.679,-20.65 119.416,-19.914 119.416,-19.152 118.171,-20.396 118.171,-24.536 ; 123.564,-81.636 124.276,-81.636 124.276,-76.149 123.564,-76.149 123.564,-81.636 ; 125.469,-75.87 128.467,-75.87 129.152,-76.556 129.152,-80.086 128.416,-80.823 128.416,-81.585 129.66,-80.34 129.66,-76.2 128.822,-75.362 125.469,-75.362 125.469,-75.87 ; 125.469,-25.375 128.822,-25.375 129.66,-24.536 129.66,-20.396 128.416,-19.152 128.416,-19.914 129.152,-20.65 129.152,-24.181 128.467,-24.867 125.469,-24.867 125.469,-25.375 ; 128.619,-37.998 129.991,-39.37 134.004,-39.37 135.401,-37.973 135.401,-30.912 134.639,-30.912 134.639,-37.592 133.597,-38.633 130.448,-38.633 129.406,-37.592 129.406,-30.912 128.619,-30.912 128.619,-37.998 ; 128.898,-69.825 129.66,-69.825 129.66,-63.144 130.702,-62.103 133.851,-62.103 134.893,-63.144 134.893,-69.825 135.68,-69.825 135.68,-62.738 134.309,-61.366 130.295,-61.366 128.898,-62.763 128.898,-69.825 ; 134.639,-80.34 135.883,-81.585 135.883,-80.823 135.147,-80.086 135.147,-76.556 135.833,-75.87 138.83,-75.87 138.83,-75.362 135.477,-75.362 134.639,-76.2 134.639,-80.34 ; 134.639,-24.536 135.477,-25.375 138.83,-25.375 138.83,-24.867 135.833,-24.867 135.147,-24.181 135.147,-20.65 135.883,-19.914 135.883,-19.152 134.639,-20.396 134.639,-24.536 ; 142.716,-78.765 148.202,-78.765 148.202,-78.054 142.716,-78.054 142.716,-78.765 ; 144.367,-24.384 149.853,-24.384 149.853,-23.673 144.367,-23.673 144.367,-24.384 ; 148.05,-100.406 148.761,-100.406 148.761,-94.92 148.05,-94.92 148.05,-100.406 ; 148.05,-92.532 148.761,-92.532 148.761,-87.046 148.05,-87.046 148.05,-92.532 ; 148.761,-13.589 149.472,-13.589 149.472,-8.103 148.761,-8.103 148.761,-13.589 ; 148.812,-5.461 149.523,-5.461 149.523,0.025 148.812,0.025 148.812,-5.461 ; 150.412,-78.765 155.899,-78.765 155.899,-78.054 150.412,-78.054 150.412,-78.765

## Other copper
Top Layer:
  region net N_CHAN: 143.478,-8.992 143.478,-13.513 140.074,-13.513 139.744,-13.183 139.719,-13.183 139.719,-10.211 140.938,-8.992
  region net N_CHAN: 30.372,-13.589 25.978,-13.589 25.978,-11.049 27.171,-9.855 27.171,-9.83 29.203,-9.83 30.372,-10.998
  region net N_CHAN: 63.087,-13.589 58.693,-13.589 58.693,-11.049 59.887,-9.855 59.887,-9.83 61.919,-9.83 63.087,-10.998
  region net N_CHAN: 96.336,-13.487 91.941,-13.487 91.941,-10.947 93.135,-9.754 93.135,-9.728 95.167,-9.728 96.336,-10.897
  region net N_CHAN: 129.102,-13.487 124.707,-13.487 124.707,-10.947 125.901,-9.754 125.901,-9.728 127.933,-9.728 129.102,-10.897
  region net N_LE: 112.617,-18.644 108.223,-18.644 108.223,-16.104 109.417,-14.91 109.417,-14.884 111.449,-14.884 112.617,-16.053
  region net N_LE: 79.978,-18.694 75.584,-18.694 75.584,-16.154 76.778,-14.961 76.778,-14.935 78.81,-14.935 79.978,-16.104
  region net N_LE: 46.526,-18.491 42.132,-18.491 42.132,-15.951 43.326,-14.757 43.326,-14.732 45.358,-14.732 46.526,-15.9
  region net N_LE: 13.836,-18.415 9.442,-18.415 9.442,-15.875 10.636,-14.681 10.636,-14.656 12.668,-14.656 13.836,-15.824
  region net 2N_LE: 135.121,-86.69 139.516,-86.69 139.516,-89.23 138.322,-90.424 138.322,-90.449 136.29,-90.449 135.121,-89.281
  region net 2N_LE: 102.254,-86.716 106.648,-86.716 106.648,-89.256 105.454,-90.449 105.454,-90.475 103.422,-90.475 102.254,-89.306
  region net 2N_LE: 69.361,-86.69 73.755,-86.69 73.755,-89.23 72.561,-90.424 72.561,-90.449 70.529,-90.449 69.361,-89.281
  region net 2N_LE: 36.417,-86.614 40.811,-86.614 40.811,-89.154 39.617,-90.348 39.617,-90.373 37.585,-90.373 36.417,-89.205
  region net 2N_CHAN: 118.738,-82.118 123.133,-82.118 123.133,-84.658 121.939,-85.852 121.939,-85.877 119.907,-85.877 118.738,-84.709
  region net 2N_CHAN: 85.668,-82.093 90.062,-82.093 90.062,-84.633 88.868,-85.827 88.868,-85.852 86.836,-85.852 85.668,-84.684
  region net 2N_CHAN: 52.902,-82.144 57.296,-82.144 57.296,-84.684 56.102,-85.877 56.102,-85.903 54.07,-85.903 52.902,-84.734
  region net 2N_CHAN: 19.831,-82.093 24.225,-82.093 24.225,-84.633 23.031,-85.827 23.031,-85.852 20.999,-85.852 19.831,-84.684
Bottom Layer:
  region net N_CHAN: 143.503,-8.966 143.503,-13.513 140.913,-13.513 140.913,-8.966
  region net N_CHAN: 30.372,-13.589 25.978,-13.589 25.978,-11.049 27.171,-9.855 27.171,-9.83 29.203,-9.83 30.372,-10.998
  region net N_CHAN: 63.087,-13.589 58.693,-13.589 58.693,-11.049 59.887,-9.855 59.887,-9.83 61.919,-9.83 63.087,-10.998
  region net N_CHAN: 96.336,-13.487 91.941,-13.487 91.941,-10.947 93.135,-9.754 93.135,-9.728 95.167,-9.728 96.336,-10.897
  region net N_CHAN: 129.102,-13.487 124.707,-13.487 124.707,-10.947 125.901,-9.754 125.901,-9.728 127.933,-9.728 129.102,-10.897
  region net N_LE: 112.617,-18.644 108.223,-18.644 108.223,-16.104 109.417,-14.91 109.417,-14.884 111.449,-14.884 112.617,-16.053
  region net N_LE: 79.978,-18.694 75.584,-18.694 75.584,-16.154 76.778,-14.961 76.778,-14.935 78.81,-14.935 79.978,-16.104
  region net N_LE: 46.526,-18.491 42.132,-18.491 42.132,-15.951 43.326,-14.757 43.326,-14.732 45.358,-14.732 46.526,-15.9
  region net N_LE: 13.836,-18.415 9.442,-18.415 9.442,-15.875 10.636,-14.681 10.636,-14.656 12.668,-14.656 13.836,-15.824
  region net 2N_LE: 135.121,-86.639 139.516,-86.639 139.516,-89.179 138.322,-90.373 138.322,-90.399 136.29,-90.399 135.121,-89.23
  region net 2N_LE: 102.254,-86.716 106.648,-86.716 106.648,-89.256 105.454,-90.449 105.454,-90.475 103.422,-90.475 102.254,-89.306
  region net 2N_LE: 69.361,-86.69 73.755,-86.69 73.755,-89.23 72.561,-90.424 72.561,-90.449 70.529,-90.449 69.361,-89.281
  region net 2N_LE: 36.417,-86.614 40.811,-86.614 40.811,-89.154 39.617,-90.348 39.617,-90.373 37.585,-90.373 36.417,-89.205
  region net 2N_CHAN: 118.738,-82.118 123.133,-82.118 123.133,-84.658 121.939,-85.852 121.939,-85.877 119.907,-85.877 118.738,-84.709
  region net 2N_CHAN: 85.668,-82.093 90.062,-82.093 90.062,-84.633 88.868,-85.827 88.868,-85.852 86.836,-85.852 85.668,-84.684
  region net 2N_CHAN: 52.902,-82.144 57.296,-82.144 57.296,-84.684 56.102,-85.877 56.102,-85.903 54.07,-85.903 52.902,-84.734
  region net 2N_CHAN: 19.831,-82.093 24.225,-82.093 24.225,-84.633 23.031,-85.827 23.031,-85.852 20.999,-85.852 19.831,-84.684

## Silkscreen, mask and mechanical layers (free items; w line width, h text height)
Top Solder:
  region: 36.417,-86.614 40.811,-86.614 40.811,-89.154 40.735,-89.23 36.417,-89.23
  region: 19.831,-82.093 24.225,-82.093 24.225,-84.633 24.149,-84.709 19.831,-84.709
  lines w2: 22.168,-94.793 22.193,-94.818 ; 55.068,-94.818 55.188,-94.698 ; 87.801,-94.677 87.943,-94.818 ; 110.407,-5.486 110.433,-5.461 ; 120.818,-94.818 120.847,-94.789
  lines w2.5: 10.204,-17.323 146.653,-17.323 ; 20.847,-83.363 144.494,-83.363 145.967,-84.836 145.967,-88.951 ; 26.587,-12.344 142.056,-12.344 ; 37.56,-87.96 140.227,-87.96 ; 142.411,-12.776 142.411,-10.16 ; 146.602,-17.297 146.602,-13.538
Bottom Solder:
  drawing of 161 lines, arcs and shapes, not listed